# EAGLE board untitled (EAGLE 7.2.0)
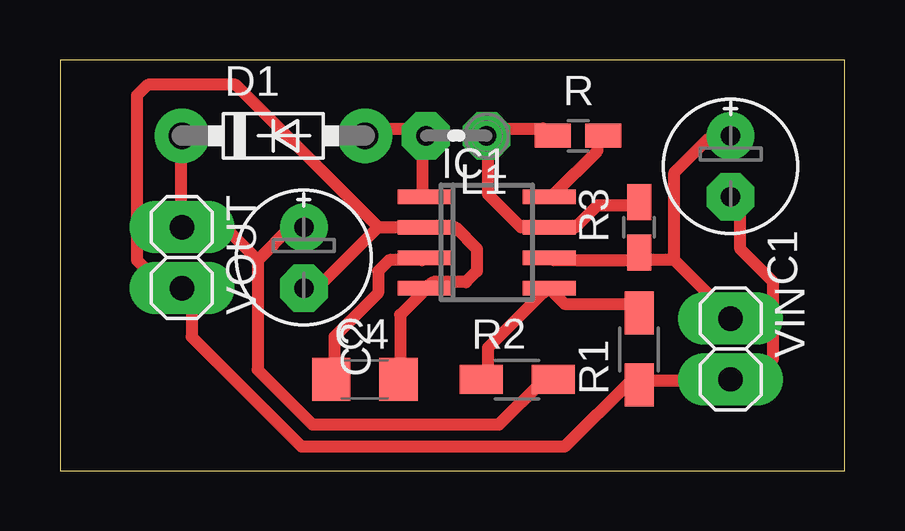
[diagram p0: board, top side]

Size 32.69 x 17.14 mm. Coordinates in mm from the lower left corner, seen from the top.
Outline: 0,0 32.69,0 32.69,17.14 0,17.14 0,0
Copper layers (1*16): Top 0.035mm / dielectric 1.5mm / Bottom 0.035mm
Design rules "default *": minimum track width 20mil, minimum drill 24mil, track to track 16mil, track to pad 16mil, pad to pad 8mil, via to via 8mil, smd to smd 8mil, copper to edge 20mil, drill to drill 8mil, minimum pad ring 23mil, minimum via ring 8mil, stop-mask expansion 4mil, vias tented up to drill 0mil, thermal gap 10mil
Net classes: 0 default: width 0.305 mm, drill 0.508 mm, clearance 0.254 mm; 1 text: width 0.127 mm

## Footprints (pad centres in the part's own frame; a part is rotated, then mirrored left to right if it is on the bottom)
E2,5-6E = drill 0.813 pad 1.575: + -1.27,0 | drill 0.813 pad 1.575 octagon: - 1.27,0
C1206 = smd 1.6 x 1.8: 1 -1.4,0; 2 1.4,0
DO41-7.6 = drill 1.1 pad 1.7: A 3.81,0; C -3.81,0
SOIC8 = smd 0.6 x 2.2: 1 -1.905,-2.6; 2 -0.635,-2.6; 3 0.635,-2.6; 4 1.905,-2.6; 5 1.905,2.6; 6 0.635,2.6; 7 -0.635,2.6; 8 -1.905,2.6
0204V = drill 0.813 octagon: 1 -1.27,0; 2 1.27,0
R0805W = smd 1.5 x 1: 1 -1.052,0; 2 1.052,0
R1206W = smd 1.8 x 1.2: 1 -1.499,0; 2 1.499,0
1X02 = drill 1.016 long: 1 -1.27,0; 2 1.27,0

## Placement (x,y rotation side)
C1  100u  [E2,5-6E]  27.94,12.7 270 top
C2  330u  [E2,5-6E]  10.16,8.89 270 top
C4  1500pF  [C1206]  12.7,3.81 0 top
D1  1N5819-B  [DO41-7.6]  8.89,13.97 0 top
IC1  MC34063AD  [SOIC8]  17.78,9.53 270 top
L1  170uH  [0204V]  16.51,13.97 180 top
R  180  [R0805W]  21.59,13.97 0 top
R1  1k  [R1206W]  24.13,5.08 90 top
R2  3k  [R1206W]  19.05,3.81 0 top
R3  0  [R0805W]  24.13,10.16 90 top
VIN  [1X02]  27.94,5.08 270 top
VOUT  [1X02]  5.08,8.89 270 top

## Library data of the parts
C1 C2 C4 L1 R R1-R3 = resistor
D1 = diode
IC1 = mc34063
VIN VOUT = pinhead

## Nets
GND: C1.- C2.- C4.2 IC1.2 IC1.4 R1.1 VIN.2 VOUT.2
N$1: D1.A IC1.1 L1.2
N$2: C2.+ D1.C R2.2 VOUT.1
N$3: C4.1 IC1.3
N$5: IC1.5 R1.2 R2.1
N$7: IC1.7 L1.1 R3.2 R.1
N$8: IC1.8 R.2
VCC: C1.+ IC1.6 R3.1 VIN.1

## Tracks (layer width: path | path; a pad name or v marks a point on that pad's centre or on a via)
GND
  Top 0.508: C1.- 28.35,11.07 28.35,9.25 29.72,7.87 29.72,4.67 29.26,4.22 28.35,4.22 VIN.2 27.89,3.76 24.23,3.76 R1.1 23.77,3.76 21.03,1.02 10.06,1.02 5.49,5.59 5.49,7.42 VOUT.2 5.03,7.87 4.12,7.87 3.2,8.79 3.2,15.65 3.66,16.1 7.32,16.1 13.26,10.16 | C4.2 14.17,4.22 14.17,6.5 15.09,7.42 IC1.4 15.54,7.87 16.92,7.87 17.37,8.33 17.37,9.25 16.46,10.16 IC1.2 13.26,10.16 | 13.26,10.16 10.52,7.42 C2.-
N$1
  Top 0.508: IC1.1 15.09,11.53 15.09,13.82 L1.2 15.09,14.28 12.8,14.28 D1.A
N$2
  Top 0.508: D1.C 5.03,13.82 5.03,10.16 VOUT.1 6.86,10.16 8.23,8.79 | 8.23,8.79 8.23,4.22 10.52,1.93 18.29,1.93 20.12,3.76 R2.2 | 8.23,8.79 9.6,10.16 C2.+
N$3
  Top 0.508: C4.1 11.43,4.22 11.43,5.59 13.26,7.42 13.26,8.33 13.72,8.79 15.09,8.79 IC1.3
N$5
  Top 0.508: R2.1 17.83,4.22 17.83,5.13 20.12,7.42 IC1.5 20.57,7.42 21.03,6.96 23.77,6.96 R1.2
N$7
  Top 0.508: R3.2 23.77,11.07 22.4,11.07 21.49,10.16 IC1.7 19.2,10.16 17.83,11.53 17.83,13.82 L1.1 17.83,14.28 20.12,14.28 R.1
N$8
  Top 0.508: R.2 22.4,13.82 22.4,13.36 20.57,11.53 IC1.8
VCC
  Top 0.508: IC1.6 20.57,8.79 23.77,8.79 R3.1 24.23,8.79 25.6,8.79 | 25.6,8.79 27.89,6.5 VIN.1 | 25.6,8.79 25.6,12.45 26.98,13.82 27.89,13.82 C1.+

## Text on the board
tRestrict: Vout - + 5V | © Sh4DoV | v1.0 | Vin - + 3.7V